# Altium PCB BADGE.PcbDoc
Units mil, origin at the board's own origin, x right, y up, seen from the top; angles counter-clockwise.
Board outline 1181.1 x 1496.06 mil, 2 copper layers (Top Layer, Bottom Layer), stack 65.792 mil thick; 25 components, 22 nets, 110 pads, 16 vias.
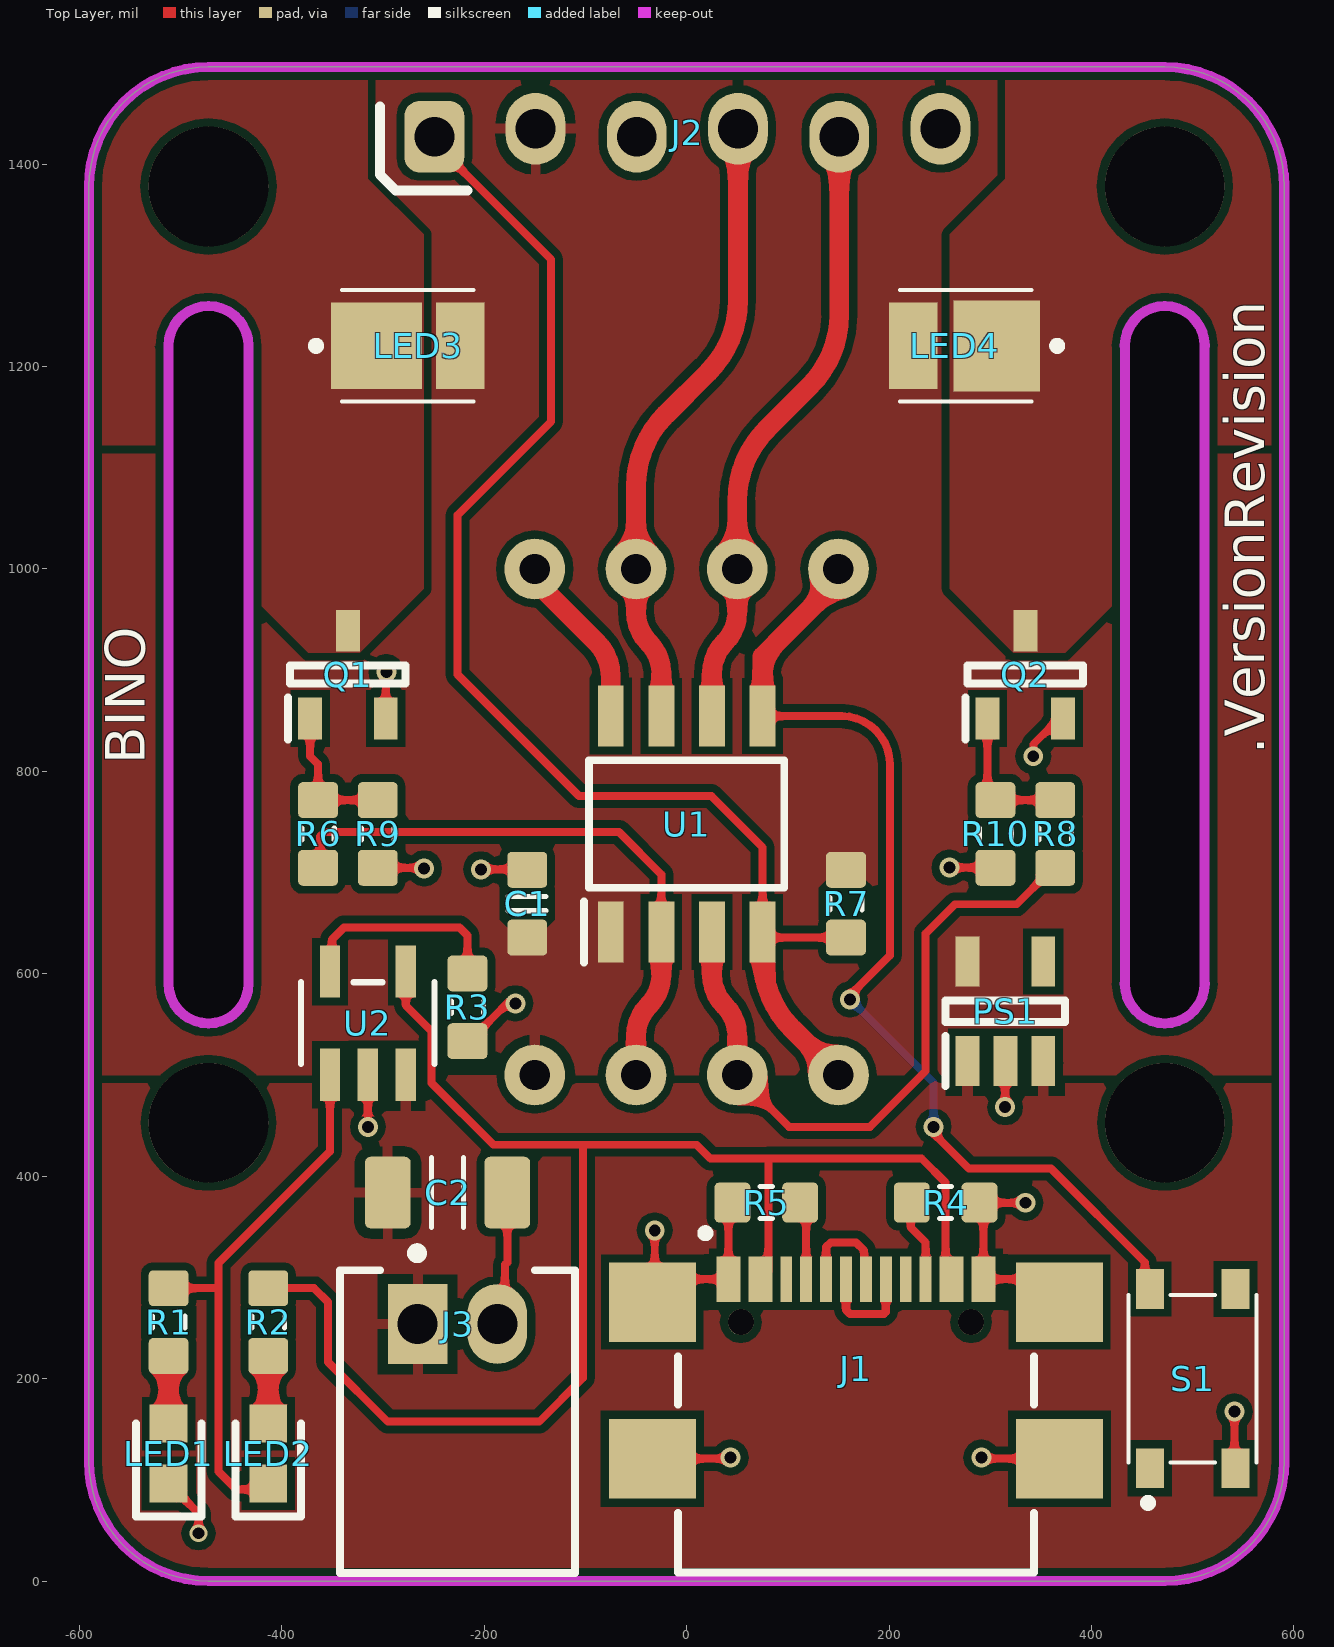
[diagram p0: Top Layer view]
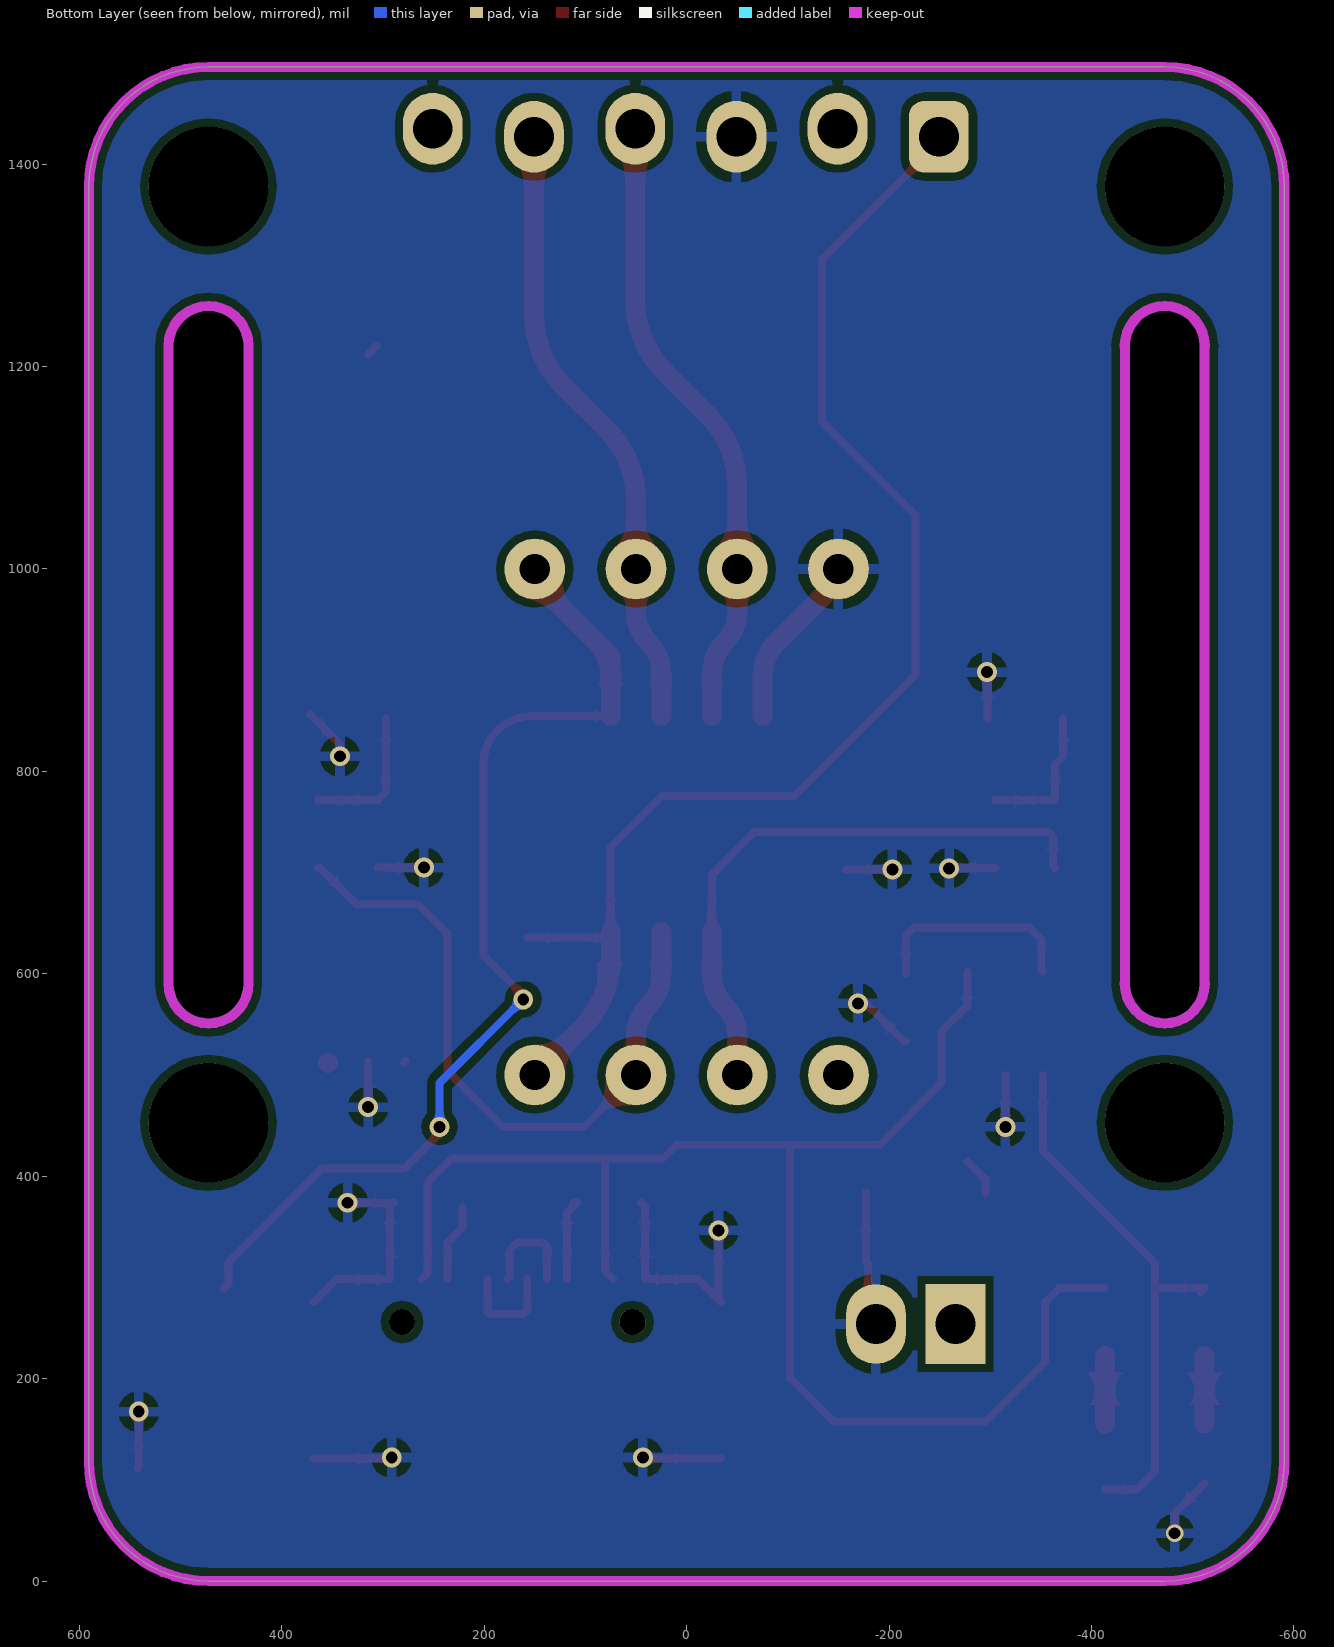
[diagram p1: Bottom Layer view, seen from below]

## Layer stack, top to bottom
Top Solder: solder mask 0.4, Solder Resist, Dk 3.5
Top Layer: signal copper 1.4
Dielectric1: dielectric 62.9921, FR-4, Dk 4.8
Bottom Layer: signal copper 1.4
Bottom Solder: solder mask 0.4, Solder Resist, Dk 3.5

## Board outline
-590.55,118.11 ccw(c-472.44,118.11) -472.44,0 472.44,0 ccw(c472.44,118.11) 590.55,118.11 590.55,1377.95 ccw(c472.44,1377.95) 472.44,1496.06 -472.44,1496.06 ccw(c-472.44,1377.95) -590.55,1377.95
cut-out: 433.07,1220.47 cw(c472.44,1220.47) 472.44,1259.84 cw(c472.44,1220.47) 511.81,1220.47 511.81,590.55 cw(c472.44,590.55) 472.44,551.18 cw(c472.44,590.55) 433.07,590.55
cut-out: -433.07,590.55 cw(c-472.44,590.55) -472.44,551.18 cw(c-472.44,590.55) -511.81,590.55 -511.81,1220.47 cw(c-472.44,1220.47) -472.44,1259.84 cw(c-472.44,1220.47) -433.07,1220.47

## Design rules (kind name [scope] priority, off if disabled: settings)
Clearance Clearance_USB_C [InComponent('J1') vs InComponent('J1')] p1: gap=6 ignorepadtopadclearanceinfootprint=FALSE
Clearance [All] p2: gap=7.87 ignorepadtopadclearanceinfootprint=FALSE
HoleSize [All] p1: absolutevalues=TRUE maxlimit=118.11 minlimit=1 maxpercent=80.000 minpercent=20.000
MinimumSolderMaskSliver MinimumSolderMaskSliver_LED [HasFootprint('STW8A12DMinJ18CAAll') vs HasFootprint('STW8A12DMinJ18CAAll')] p1: minsoldermaskwidth=5
MinimumSolderMaskSliver MinimumSolderMaskSliver_SOT95 [HasFootprint('SOT95P275X110-5N') vs HasFootprint('SOT95P275X110-5N')] p2: minsoldermaskwidth=5
MinimumSolderMaskSliver [All] p3: minsoldermaskwidth=10
PolygonConnect LED_DISSIPATE_3V3 [All vs IsNamedPolygon('TOP_VCC3V3')] p1: thpad.connectstyle=Relief thpad.reliefconductorwidth=10 thpad.reliefentries=4 thpad.polygonreliefangle="90 Angle" thpad.airgapwidth=10 smdpad.connectstyle=Direct smdpad.reliefconductorwidth=10 smdpad.reliefentries=4 smdpad.polygonreliefangle="90 Angle" smdpad.airgapwidth=10 via.connectstyle=Relief via.reliefconductorwidth=10 via.reliefentries=4 via.polygonreliefangle="90 Angle" via.airgapwidth=10
PolygonConnect LED_DISSIPATION [All vs IsNamedPolygon('Top Layer-NetLED3_1') or IsNamedPolygon('Top Layer-NetLED4_1')] p2: thpad.connectstyle=Relief thpad.reliefconductorwidth=10 thpad.reliefentries=4 thpad.polygonreliefangle="90 Angle" thpad.airgapwidth=10 smdpad.connectstyle=Direct smdpad.reliefconductorwidth=10 smdpad.reliefentries=4 smdpad.polygonreliefangle="90 Angle" smdpad.airgapwidth=10 via.connectstyle=Relief via.reliefconductorwidth=10 via.reliefentries=4 via.polygonreliefangle="90 Angle" via.airgapwidth=10
PolygonConnect [All] p3: connectstyle=Relief reliefconductorwidth=10 reliefentries=4 polygonreliefangle="90 Angle" airgapwidth=10
RoutingVias [All] p1: holewidth=28 width=50 viastyle="Through Hole" minholewidth=11.81 minwidth=17.72 maxholewidth=28 maxwidth=19.68
SilkToSolderMaskClearance SilkscreenOverComponentPads [IsPad] p1: minsilkscreentomaskgap=4 clearancetoexposedcopper=TRUE
SolderMaskExpansion [All] p1: expansion=4 istentingtop=FALSE
Width [All] p1: maxlimit=39.37 minlimit=6 preferedwidth=6
27 further rules are at their usual default settings.

## Components (designator, comment, footprint, x,y, rotation, side; value= is the part's Value field where it differs from the comment)
C1 "approved sub OK" CAPC1608X90N -157.48,669.29 r270 top value=100n
C2 "approved sub OK" CAPC3216X180N -236.22,383.86 r0 top value=10µ
J1 "USB4110-GF-A" GCT_USB4110-GF-A 167.32,255.91 r0 top
J2 "pickit3" CONN_ICSP -249.21,1427.17 r0 top
J3 "S2B-PH-K-S(LF)(SN)" JST-S2B-PH-K-S_V -226.38,157.48 r0 top
LED1 "150060GS75000" LEDC1608X80N -511.81,125.98 r90 top
LED2 "150060RS75000" LEDC1608X80N -413.39,125.98 r90 top
LED3 "S1W0-2835408003-0000003S-00005" STW8A12DMINJ18CAALL -275.59,1220.47 r180 top
LED4 "S1W0-2835408003-0000003S-00005" STW8A12DMinJ18CAAll 275.59,1220.47 r0 top
PS1 "NCP114ASN330T1G" SOT95P275X110-5N 314.96,562.99 r90 top
Q1 "2N7002NXBKR" SOT95P230X110-3N -334.65,895.67 r90 top
Q2 "2N7002NXBKR" SOT95P230X110-3N 334.65,895.67 r90 top
R1 "Thick Film" RESC1608X55N -511.81,255.91 r270 top value=1K
R2 "Thick Film" RESC1608X55N -413.39,255.91 r270 top value=1K
R3 "Thick Film" RESC1608X55N -216.54,566.93 r270 top value=10K
R4 "RES 5.1K OHM 5% 1/10W 0603" RESC1608X55N 255.91,374.02 r180 top value=5.1K
R5 "RES 5.1K OHM 5% 1/10W 0603" RESC1608X55N 78.74,374.02 r0 top value=5.1K
R6 "Thick Film" RESC1608X55N -364.17,738.19 r90 top value=1K
R7 "Thick Film" RESC1608X55N 157.48,669.29 r270 top value=10K
R8 "Thick Film" RESC1608X55N 364.17,738.19 r90 top value=1K
R9 "Thick Film" RESC1608X55N -305.12,738.19 r270 top value=1M
R10 "Thick Film" RESC1608X55N 305.12,738.19 r270 top value=1M
S1 "PTS815_SJM_250_SMTR_LFS" PTS815SJM250SMTRLFS 500,200 r90 top
U1 "PIC12F1840-I_SN" SOIC127P600X175-8N 0,748.03 r90 top
U2 "MCP73831T-2ACI/OT" SOT-23-5_MC_MCH -314.96,551.18 r90 top

## Footprints (in the part's own frame and the unit in brackets; to place one, negate y for a bottom-side part, rotate by r counter-clockwise, add the part's x,y. Pads: shape width x height; smd on the part's side, far side on the other; paste and mask are expansions set on the pad)
CAPC1608X90N [mm] "Chip Capacitor, Body 1.6x0.8mm, EIA 0603, IPC Medium Density"
  round 0.254 on Mech15: 0(0,0)
  rrect25% 0.9x1 smd: 1(-0.85,0) 2(0.85,0)
  Top Layer pour cut-out: -0.6,0.5 -0.4,0.7 0.4,0.7 0.6,0.5 0.6,-0.5 0.4,-0.7 -0.4,-0.7 -0.6,-0.5
  silkscreen extent -0.18,-0.48 0.18,0.48, body extent -0.85,-0.45 0.85,0.45, height 0.89
CAPC3216X180N [mm] "Chip Capacitor, Body 3.2x1.6mm, 1.8mm H, EIA 1206, IPC Medium Density"
  round 0.508 on Mech15: 0(0,0)
  rrect25% 1.15x1.8 smd: 1(-1.5,0) 2(1.5,0)
  silkscreen extent -0.4,-0.88 0.4,0.88, body extent -1.7,-0.9 1.7,0.9, height 1.8
CONN_ICSP [mm] "ICSP CONNECTOR FOR PICKIT3  PITCH2.54MM"
  rrect50% 1.5x1.8 hole 1: 1(0,0)
  oval 1.5x1.8 hole 1: 2(2.54,0.2) 3(5.08,0) 4(7.62,0.2) 5(10.16,0) 6(12.7,0.2)
GCT_USB4110-GF-A [mm]
  rect 0.6x1.15 smd: A1/B12(-3.2,1.075) A4/B9(-2.4,1.075) B1/A12(3.2,1.075) B4/A9(2.4,1.075)
  rect 0.3x1.15 smd: A5(-1.25,1.075) A6(-0.25,1.075) A7(0.25,1.075) A8(1.25,1.075) B5(1.75,1.075) B6(0.75,1.075) B7(-0.75,1.075) B8(-1.75,1.075)
  rect 2.18x2 smd: S1(-5.11,0.5) S2(5.11,0.5) S3(-5.11,-3.43) S4(5.11,-3.43)
  round 0.65 hole 0.65 unplated: ""(-2.89,0) ""(2.89,0)
  silkscreen extent -4.47,-6.28 4.47,2.33, body extent -5.65,-6.28 5.65,1.4, height 3.25
JST-S2B-PH-K-S_V [mm] "THD, 2-Leads, Body 7.6x5.9mm, Pitch 2mm"
  rect 1.5x2 hole 1: 1(-1,2.45)
  oval 1.5x2 hole 1: 2(1,2.45)
  silkscreen extent -2.95,-3.8 2.95,4.35, body extent -2.95,-3.8 2.95,3.8, height 4.8
LEDC1608X80N [mm]
  rect 0.95x0.95 smd: 1(-0.75,0) 2(0.75,0)
  silkscreen extent -1.58,-0.82 0.75,0.82, body extent -0.8,-0.4 0.8,0.4, height 0.7
PTS815SJM250SMTRLFS [mm]
  rect 1x0.7 smd: 1(-2.25,1.075) 2(2.25,1.075) 3(-2.25,-1.075) 4(2.25,-1.075)
  silkscreen extent -3.22,-1.6 2.1,1.61, body extent -2.25,-1.6 2.25,1.6, height 2.5
RESC1608X55N [mm] "Chip Resistor, Body 1.6x0.8mm, EIA 0603, IPC Medium Density"
  round 0.254 on Mech15: 0(0,0)
  rrect25% 0.9x1 smd: 1(-0.85,0) 2(0.85,0)
  Top Layer pour cut-out: -0.6,0.5 -0.4,0.7 0.4,0.7 0.6,0.5 0.6,-0.5 0.4,-0.7 -0.4,-0.7 -0.6,-0.5
  silkscreen extent -0.15,-0.41 0.15,0.41, body extent -0.87,-0.47 0.88,0.48, height 0.54
SOIC127P600X175-8N [mm]
  rect 1.525x0.65 smd: 1(-2.712,1.905) 2(-2.712,0.635) 3(-2.712,-0.635) 4(-2.712,-1.905) 5(2.712,-1.905) 6(2.712,-0.635) 7(2.712,0.635) 8(2.712,1.905)
  silkscreen extent -3.47,-2.45 1.6,2.58, body extent -3,-2.45 3,2.45, height 1.75
SOT95P230X110-3N [mm]
  rect 1.05x0.6 smd: 1(-1.1,0.95) 2(-1.1,-0.95) 3(1.1,0)
  silkscreen extent -1.63,-1.45 0.23,1.5, body extent -1.15,-1.45 1.15,1.45, height 1.1
SOT95P275X110-5N [mm]
  rect 1.25x0.6 smd: 1(-1.25,0.95) 2(-1.25,0) 3(-1.25,-0.95) 4(1.25,-0.95) 5(1.25,0.95)
  silkscreen extent -1.88,-1.5 0.28,1.5, body extent -1.38,-1.5 1.38,1.5, height 1.1
SOT-23-5_MC_MCH [mil]
  rect 51.56x20 smd paste+0 mask+0: 1(-51,37.4) 2(-51,0) 3(-51,-37.4) 4(51,-37.4) 5(51,37.4)
  silkscreen extent -41,-66 41,66, body extent -63,-61 63,61, height 57
STW8A12DMINJ18CAALL [mm]
  rect 2.28x2.17 smd: 1(0.785,0)
  rect 1.22x2.17 smd: 2(-1.315,0)
  silkscreen extent -1.65,-1.4 2.4,1.4, body extent -1.5,-1 1.5,1, height 0.52
STW8A12DMinJ18CAAll [mm]
  rect 2.17x2.28 smd: 1(0.785,0)
  rect 1.22x2.17 smd: 2(-1.315,0)
  silkscreen extent -1.65,-1.4 2.4,1.4, body extent -1.5,-1 1.5,1, height 0.52

## Part data
C1: library part CAPC_100n_0603_X7R_50V_10%, "Capacitor SMD Cer 100nF 10% 50V X7R 0603", Manufacturer 1="AVX Corporation", Manufacturer 2="TDK Corporation", Manufacturer Part Number 1=06035C104KAT2A, Manufacturer Part Number 2=C1608X7R1H104K, Package / Case="0603 (1608 Metric)", Ratings="50V; X7R", Supplier Part Number 1=478-5052-1-ND, Tolerance=±10%, ComponentLink1Description=http://www.avx.com/docs/Catalogs/cx7r.pdf, ComponentLink1URL=http://www.avx.com/docs/Catalogs/cx7r.pdf, ComponentLink2Description=http://product.tdk.com/capacitor/mlcc/en/documents/mlcc_commercial_general_en.pdf, ComponentLink2URL=http://product.tdk.com/capacitor/mlcc/en/documents/mlcc_commercial_general_en.pdf, Material=ceramic, SCDType=spec, Supplier 1=Digi-Key, Supplier 2=Digi-Key, Supplier Part Number 2=445-1314-1-ND
C2: library part CAPC_10u_1206_25V, "Capacitor SMD Cer 10uF 10% 25V X7R 1206", Package / Case="1206 (3216 metric)", Ratings="16V; X7R", Supplier Part Number 1=1276-1804-1-ND, Tolerance=±10%, Material=ceramic, SCDType=spec, Supplier 1=Digi-Key
J1: "USB-C _USB TYPE-C_ USB 2.0 Receptacle Connector 24 _16+8 Dummy_ Position Surface Mount, Right Angle; Through Hole", Package=None, Digi-Key_Part_Number=2073-USB4110-GF-A-1-ND, Digi-Key_Purchase_URL=https://www.digikey.com/product-detail/en/gct/USB4110-GF-A/2073-USB4110-GF-A-1-ND/10384548?utm_source=snapeda&utm_medium=aggregator&utm_campaign=symbol, MF=GCT, MP=USB4110-GF-A, SnapEDA_Link=https://www.snapeda.com/parts/USB4110-GF-A/Global%20Connector%20Technology/view-part/4001167/?ref=snap
J2: library part "CONN PROG PICKIT3", "CONN PROG PICKIT3 6VIAS", device=pickit3, pitch_in_mm=2.54
J3: library part "CONN JST 2P 2MM", "Male Header, Pitch 2 mm, 1 x 2 Position, Height 4.8 mm, Tail Length 3.4 mm, -25 to 85 degC, RoHS, Bulk", Capacitance="10 uF", Case\Package=Radial, Max Operating Temperature="85 degC", Min Operating Temperature="-40 degC", Package Quantity=200, Tolerance=20%, Voltage Rating="50 V", ComponentLink1Description=Datasheet, ComponentLink1URL=http://www.jst-mfg.com/product/pdf/eng/ePH.pdf, DatasheetVersion=Dec-12, Diameter="5 mm", Height="11 mm", Lead Pitch="2 mm", Length="11 mm", Mount="Through Hole", PackageDescription="Male Header, Pitch 2 mm, 1 x 2 Position, Height 4.8 mm, Tail Length 3.4 mm", PackageReference=S2B-PH-K-S, Packaging=Bulk, Pins=2, Radiation Hardening=No, REACH SVHC="No SVHC", RoHSCompliant=true, Voltage Rating (DC)="50 V"
LED1: "LED", Manufacturer_Name="Wurth Elektronik", Mouser Part Number=710-150060GS75000, Datasheet Link=https://componentsearchengine.com/Datasheets/2/150060GS75000.pdf, Height=0.8mm, Manufacturer_Part_Number=150060GS75000, Mouser Price/Stock=https://www.mouser.co.uk/ProductDetail/Wurth-Elektronik/150060GS75000?qs=LlUlMxKIyB0UYkq5lDO8nA%3D%3D
LED2: "LED", Manufacturer_Name="Wurth Elektronik", Mouser Part Number=710-150060RS75000, Datasheet Link=http://katalog.we-online.de/led/datasheet/150060RS75000.pdf, Height=0.8mm, Manufacturer_Part_Number=150060RS75000, Mouser Price/Stock=https://www.mouser.co.uk/ProductDetail/Wurth-Elektronik/150060RS75000?qs=LlUlMxKIyB3QnmZ3fw%2FVCA%3D%3D
LED3 LED4: "LED", Manufacturer_Name="SEOUL SEMICONDUCTOR", Datasheet Link=http://seoulsemicon.com/upload2/STW8A12D_S1.pdf, Height=0mm, Manufacturer_Part_Number=S1W0-2835408003-0000003S-00005
PS1: "Power Supply", Manufacturer_Name="ON Semiconductor", Mouser Part Number=863-NCP114ASN330T1G, Arrow Part Number=NCP114ASN330T1G, Arrow Price/Stock=https://www.arrow.com/en/products/ncp114asn330t1g/on-semiconductor, Datasheet Link=https://componentsearchengine.com/Datasheets/2/NCP114ASN330T1G.pdf, Height=1.1mm, Manufacturer_Part_Number=NCP114ASN330T1G, Mouser Price/Stock=https://www.mouser.co.uk/ProductDetail/ON-Semiconductor/NCP114ASN330T1G?qs=OycAS1CGnljPBnaqdh%252BGIA%3D%3D
Q1 Q2: "MOSFET (N-Channel)", Manufacturer_Name=Nexperia, Mouser Part Number=771-2N7002NXBKR, Arrow Part Number=2N7002NXBKR, Arrow Price/Stock=https://www.arrow.com/en/products/2n7002nxbkr/nexperia, Datasheet Link=https://componentsearchengine.com/Datasheets/1/2N7002NXBKR.pdf, Height=1.1mm, Manufacturer_Part_Number=2N7002NXBKR, Mouser Price/Stock=https://www.mouser.co.uk/ProductDetail/Nexperia/2N7002NXBKR?qs=%252B6g0mu59x7J2ddJstTJGkQ%3D%3D
R1 R2 R6 R8: library part RES_1K_0603_5%, "Resistor SMD chip 1k Ohm 0.1W 5% 0603", Manufacturer 1=Yageo, Manufacturer 2="Vishay Dale", Manufacturer Part Number 1=RC0603JR-071KL, Manufacturer Part Number 2=CRCW06031K00JNEA, Package / Case="0603 (1608 metric)", Ratings="1/10 W", Supplier Part Number 1=311-1.0KGRCT-ND, Tolerance=±5%, ComponentLink1Description=http://www.yageo.com/documents/recent/PYu-RC0603_51_RoHS_L_4.pdf, ComponentLink1URL=http://www.yageo.com/documents/recent/PYu-RC0603_51_RoHS_L_4.pdf, ComponentLink2Description=http://www.vishay.com/doc?20008, ComponentLink2URL=http://www.vishay.com/doc?20008, Material="Thick Film", SCDType=spec, Supplier 1=Digi-Key, Supplier 2=Digi-Key, Supplier Part Number 2=541-1.0KGCT-ND
R3 R7: library part RES_10K_0603_5%, "Resistor SMD chip 10k Ohm 0.1W 5% 0603", Manufacturer 1=Yageo, Manufacturer 2="Vishay Dale", Manufacturer Part Number 1=RC0603JR-0710KL, Manufacturer Part Number 2=CRCW060310K0JNEA, Package / Case="0603 (1608 metric)", Ratings="1/10 W", Supplier Part Number 1=311-10KGRCT-ND, Tolerance=±5%, ComponentLink1Description=http://www.yageo.com/documents/recent/PYu-RC0603_51_RoHS_L_4.pdf, ComponentLink1URL=http://www.yageo.com/documents/recent/PYu-RC0603_51_RoHS_L_4.pdf, ComponentLink2Description=http://www.vishay.com/doc?20035, ComponentLink2URL=http://www.vishay.com/doc?20035, Material="Thick Film", SCDType=spec, Supplier 1=Digi-Key, Supplier 2=Digi-Key, Supplier Part Number 2=541-10KGCT-ND
R4 R5: "5.1 kOhms ±5% 0.1W, 1/10W Chip Resistor 0603 (1608 Metric) Automotive AEC-Q200, Moisture Resistant Thick Film", Supplier Part Number 1=2019-RK73B1JTTD512JCT-ND, Supplier 1=Digi-Key
R9 R10: library part RES_1M_0603_5%, "Resistor SMD chip 1M Ohm 0.1W 5% 0603", Manufacturer 1="Vishay Dale", Manufacturer 2=Yageo, Manufacturer Part Number 1=CRCW06031M00JNEA, Manufacturer Part Number 2=RC0603JR-071ML, Package / Case="0603 (1608 metric)", Ratings="1/10 W", Supplier Part Number 1=541-1.0MGCT-ND, Tolerance=±5%, ComponentLink1Description=http://www.vishay.com/doc?20008, ComponentLink1URL=http://www.vishay.com/doc?20008, ComponentLink2Description=http://www.yageo.com/documents/recent/PYu-RC0603_51_RoHS_L_4.pdf, ComponentLink2URL=http://www.yageo.com/documents/recent/PYu-RC0603_51_RoHS_L_4.pdf, Material="Thick Film", SCDType=spec, Supplier 1=Digi-Key, Supplier 2=Digi-Key, Supplier Part Number 2=311-1.0MGRCT-ND
S1: "Switch", Arrow Part Number="PTS815 SJM 250 SMTR LFS", Manufacturer_Name="C & K COMPONENTS", Mouser Part Number=611-PTS815SJM250SMTR, Arrow Price/Stock=https://www.arrow.com/en/products/pts815-sjm-250-smtr-lfs/ck, Datasheet Link="https://componentsearchengine.com/Datasheets/1/PTS815 SJM 250 SMTR LFS.pdf", Height=2.7mm, Manufacturer_Part_Number="PTS815 SJM 250 SMTR LFS", Mouser Price/Stock=https://www.mouser.co.uk/ProductDetail/CK/PTS815-SJM-250-SMTR-LFS?qs=ahcBuItHZ3xKWmfV%2F2E6bA%3D%3D
U1: "Integrated Circuit", Arrow Part Number=PIC12F1840-I/SN, Manufacturer_Name=Microchip, Mouser Part Number=579-PIC12F1840-I/SN, Arrow Price/Stock=https://www.arrow.com/en/products/pic12f1840-isn/microchip-technology, Datasheet Link=http://ww1.microchip.com/downloads/en/DeviceDoc/40001441F.pdf, Height=1.75mm, Manufacturer_Part_Number=PIC12F1840-I/SN, Mouser Price/Stock=https://www.mouser.co.uk/ProductDetail/Microchip-Technology/PIC12F1840-I-SN?qs=gdymDg%2FOn%252BGgQL%2FWyG8YaA%3D%3D
U2: library part MCP73831T-2ACI/O, "No Description Available", Built_By=EMA_UL_Team, Copyright="Copyright (C) 2018 Accelerated Designs. All rights reserved", Manufacturer_Part_Number=MCP73831T-2ACI/OT, RefDes=RefDes, SourceLibrary=Microchip_2011-05-13, Type=DEV, Vendor=Microchip

## Free pads (board coordinates)
  round 60 hole 30: 1(-150,500) 2(-50,500) 3(50,500) 4(150,500) 5(150,1000) 6(50,1000) 7(-50,1000) 8(-150,1000)
  round 118.11 hole 118.11: 10(-472.44,452.76) 10(-472.44,1377.95) 10(472.44,452.76) 10(472.44,1377.95)

## Via types
v1: diameter 19.68, hole 11.81, Top Layer to Bottom Layer, tented both sides, 11 vias
v2: diameter 19.68, hole 11.81, Top Layer to Bottom Layer, 4 vias
v3: diameter 17.72, hole 11.81, Top Layer to Bottom Layer, tented both sides, 1 vias

## Nets (pads, with @x,y where several pads share a name; then routed paths per layer and width w, separated by ;. In a path a pad name is that pad's centre, name@x,y a point inside that pad or via, vN(x,y) a via of type N, cw(c..) or ccw(c..) an arc to the next point about the centre after c; other vN are vias at no path point)
CC1: J1.A5 R5.2 | length 83.8
  Top Layer w7.87: R5.2 108.27,374.02 118.11,364.17 J1.A5
CC2: J1.B5 R4.2 | length 77
  Top Layer w7.87: R4.2@221.46,369.09 221.46,349.41 236.22,334.65 J1.B5
DN: J1.A7 J1.B7 | length 103.7
  Top Layer w7.87: J1.B7 137.8,330.03 142.41,334.65 167.32,334.65 175.2,326.77 175.2,300.2 J1.A7
DP: J1.A6 J1.B6 | length 104.8
  Top Layer w7.87: J1.A6 157.48,267.72 161.42,263.78 194.88,263.78 196.85,265.75 J1.B6
GND: C1.1 C2.2 J1.A1/B12 J1.B1/A12 J1.S1 J1.S2 J1.S3 J1.S4 J2.3 J3.2 LED1.1 pad.8 PS1.2 Q1.2 Q2.2 R3.2 R4.1 R5.1 R9.2 R10.2 S1.3 U1.8 U2.2 | length 1398.1
  Top Layer w7.87: LED1.1 -482.28,66.93 v3(-482.28,47.24) ; v2@-314.96,452.76 U2.2 ; R9.2 v1@-259.84,704.72 ; Q1.2 v1@-297.24,897.64 ; R3.2 -214.57,533.46 -177.17,570.87 v2(-169.29,570.87) ; v1(-203.25,703.25) -157.97,703.25 C1.1 ; J3.2 -179.47,261.47 -179.47,312.65 -177.17,314.96 C2.2 ; U1.8@-75.77,855.57 U1.8 ; J1.S3 38.19,120.87 39.37,122.05 v2(43.31,122.05) ; J1.S1 J1.S1@-31.5,277.95 ; v1(-31.5,346.46) J1.S1@-31.5,277.95 ; R5.1 41.34,370.08 J1.A1/B12 -11.22,298.23 J1.S1@-31.5,277.95 ; v1(259.6,704.97) R10.2@304.87,704.97 ; R4.1 R4.1@289.62,373.77 ; v2(291.34,122.05) 292.52,120.87 J1.S4 ; v1(314.71,468.26) PS1.2@314.71,513.53 ; v1(334.89,373.77) R4.1@289.62,373.77 ; v1(342.52,814.96) 342.52,826.77 Q2.2@371.8,856.05 ; J1.S2 345.87,298.23 J1.B1/A12 293.31,370.08 R4.1@289.62,373.77 ; v1(541.34,167.32) 541.34,112.4 S1.3
  Top Layer w19.68: pad.8@-149.23,987.82 -89.03,927.62 cw(c-123,893.7) -75,893.7 U1.8
  other v1: -259.35,704.23 -296.75,898.13
  other v2: -314.96,448.82
ICSPCLK: J2.5 pad.6 U1.6 | length 598.3
  Top Layer w19.68: U1.6 25,897.09 cw(c67.68,897.09) 37.5,927.26 ccw(c7.32,957.44) 50,957.44 pad.6@50,975.2 ; pad.6@42.29,992.29 pad.6 50,1067.63 cw(c150,1067.63) 51.97,1087.41 cw(c150,1067.63) 79.29,1138.34 121.5,1180.55 ccw(c50.79,1251.26) 150.79,1251.26 J2.5
ICSPDAT: J2.4 pad.7 U1.7 | length 644.9
  Top Layer w7.87: pad.7@-50,975.2 pad.7 pad.7@-50,975.2
  Top Layer w19.68: pad.7@-50,975.2 -50,957.44 ccw(c-7.32,957.44) -37.5,927.26 cw(c-67.68,897.09) -25,897.09 U1.7 ; pad.7 -50,1081.81 cw(c50,1081.81) -20.71,1152.52 21.5,1194.73 ccw(c-49.21,1265.44) 50.79,1265.44 J2.4
M\C\L\R\: J2.1 pad.4 R7.2 U1.4 | length 1329.3
  Top Layer w7.87: J2.1 -249.21,1421.26 -133.86,1305.91 -133.86,1145.67 -226.38,1053.15 -226.38,895.67 -106.3,775.59 24.41,775.59 75,725 U1.4 ; U1.4@75.77,638.01 77.95,635.83 R7.2 ; pad.4 pad.4@153.74,503.74
  Top Layer w19.68: U1.4 75,616.42 ccw(c175,616.42) 104.29,545.71 pad.4
NetLED1_2: LED1.2 R1.2 | length 131.9
  Top Layer w7.87: LED1.2@-511.81,157.48 R1.2
  Top Layer w19.68: LED1.2 R1.2
NetLED2_2: LED2.2 R2.2 | length 66.9
  Top Layer w19.68: LED2.2 R2.2
NetLED3_1: LED3.1 Q1.3
NetLED4_1: LED4.1 Q2.3 | length 12
  Top Layer w7.87: LED4.1 LED4.1@314.96,1212.01
NetQ1_1: Q1.1 R6.2 R9.1 | length 143
  Top Layer w7.87: Q1.1 -372.05,814.96 -364.17,807.09 R6.2 R9.1
NetQ2_1: Q2.1 R8.2 R10.1 | length 143
  Top Layer w7.87: Q2.1 297.24,779.53 R10.1 R8.2
NetR3_1: R3.1 U2.5 | length 211.9
  Top Layer w7.87: U2.5 -350.39,604.15 -350.39,633.86 -338.58,645.67 -224.41,645.67 -216.54,637.8 R3.1
PWM1: pad.2 R6.1 U1.2 | length 595.8
  Top Layer w7.87: U1.2 -25,698.23 -66.93,740.16 -357.59,740.16 -362.2,735.55 R6.1@-362.2,706.69 ; R6.1@-362.2,706.69 R6.1 R6.1@-362.2,706.69
  Top Layer w19.68: pad.2 -50,538.62 cw(c-7.32,538.62) -37.5,568.8 ccw(c-67.68,598.98) -25,598.98 U1.2
PWM2: pad.3 R8.1 U1.3 | length 668.9
  Top Layer w7.87: pad.3 101.18,448.82 181.1,448.82 236.22,503.94 236.22,639.76 265.18,668.72 326.2,668.72 362.2,704.72 R8.1
  Top Layer w19.68: U1.3 25,598.98 ccw(c67.68,598.98) 37.5,568.8 cw(c7.32,538.62) 50,538.62 pad.3
RA2: pad.5 S1.2 U1.5 | length 1185.1
  Top Layer w7.87: v1(161.42,574.8) 161.42,578.74 200.79,618.11 200.79,807.09 ccw(c153.27,807.09) 153.27,854.61 U1.5@74.8,854.61 ; v1(244.09,448.82) 244.09,442.25 278.8,407.54 360.17,407.54 452.76,314.96 452.76,293.5 S1.2 ; U1.5@74.8,854.61 U1.5 U1.5@74.8,854.61 ; pad.5@149.61,1000 pad.5 pad.5@149.61,1000
  Top Layer w19.68: 89.03,927.62 ccw(c123,893.7) 75,893.7 U1.5 75,913.58 149.23,987.82 89.06,927.64
  Bottom Layer w7.87: v1(161.42,574.8) 244.09,492.13 v1(244.09,448.82)
STAT: LED2.1 R1.1 U2.1 | length 555.3
  Top Layer w7.87: LED2.1@-413.39,90.55 -444.88,90.55 -462.6,108.27 -462.6,291.34 ; U2.1 -352.36,424.58 -462.6,314.34 -462.6,291.34 ; R1.1 -507.87,285.43 R1.1 ; R1.1 -464.57,289.37 -462.6,291.34
VBAT: C2.1 J3.1 PS1.1 PS1.3 U2.3 | length 48.8
  Top Layer w7.87: C2.1 -295.28,396.65 C2.1@-277.56,414.37 ; J3.1@-267.72,255.91 J3.1 ; PS1.1 PS1.1@279.37,511.97 ; PS1.3 PS1.3@354.17,511.97
  Top Layer w19.68: J3.1@-267.72,251.97 J3.1 ; PS1.3@354.17,511.97 PS1.3@354.33,511.81
VCC3V3: C1.2 J2.2 LED3.2 LED4.2 pad.1 PS1.5 R7.1 U1.1 | length 13.4
  Top Layer w19.68: pad.1 pad.1@-150,507.48 ; J2.2@-149.21,1429.13 J2.2
VCC5V0: J1.A4/B9 J1.B4/A9 R2.1 U2.4 | length 1538.9
  Top Layer w7.87: R2.1 -409.45,289.37 -368.11,289.37 -354.33,275.59 -354.33,216.54 -295.28,157.48 -145.67,157.48 -102.36,200.79 -102.36,431.1 ; U2.4 -277.42,602.04 -277.42,568.76 -251.97,543.31 -251.97,492.13 -190.94,431.1 -102.36,431.1 ; J1.A4/B9 80.71,306.1 80.71,415.35 78.74,417.32 ; J1.B4/A9 255.91,304.13 255.91,393.7 232.28,417.32 78.74,417.32 ; -102.36,431.1 9.84,431.1 23.62,417.32 78.74,417.32
pads on no net: C1.0 C2.0 J1. J1.A8 J1.B8 J2.6 PS1.4 R1.0 R2.0 R3.0 R4.0 R5.0 R6.0 R7.0 R8.0 R9.0 R10.0 S1.1 S1.4

## Polygon pours and split planes (outlines as drawn)
VBAT on Top Layer "Top Layer-VBAT" (solid, pour order 10): -590.55,500 590.55,500 590.55,0 -590.55,0
VCC3V3 on Top Layer "TOP_VCC3V3" (solid, pour order 8): -590.55,1496.06 590.55,1496.06 590.55,500 -590.55,500
NetLED4_1 on Top Layer "Top Layer-NetLED3_1" (solid, remove dead copper, pour order 6): 322.83,917.32 259.84,980.31 259.84,1330.71 314.96,1385.83 314.96,1496.06 590.55,1496.06 590.55,1122.05 433.07,1122.05 433.07,976.38 374.02,917.32
NetLED3_1 on Top Layer "Top Layer-NetLED3_1" (solid, remove dead copper, pour order 4): -322.83,917.32 -259.84,980.31 -259.84,1330.71 -314.96,1385.83 -314.96,1496.06 -590.55,1496.06 -590.55,1122.05 -433.07,1122.05 -433.07,976.38 -374.02,917.32
GND on Bottom Layer "Bottom Layer-No Net" (solid, pour order 0): -590.55,1496.06 -590.55,0 590.55,0 590.55,1496.06

## Keep-outs
Keep-Out Layer:
  lines w10: -511.98,590.38 ccw(c-472.44,590.55) -432.9,590.38 ; -511.81,590.55 -511.81,1220.3 ccw(c-511.98,1220.3) -511.98,1220.47 cw(c-472.44,1220.3) -432.9,1220.47 ; -433.07,590.55 -433.07,1220.3 ; 432.9,590.38 ccw(c472.44,590.55) 511.98,590.38 ; 432.9,1220.47 cw(c472.44,1220.3) 511.98,1220.47 ; 433.07,590.55 433.07,1220.3 ; 511.81,590.55 511.81,1220.3 ; -590.55,118.11 ccw(c-472.44,118.11) -472.44,0 472.44,0 ccw(c472.44,118.11) 590.55,118.11 590.55,1377.95 ccw(c472.44,1377.95) 472.44,1496.06 -472.44,1496.06 ccw(c-472.44,1377.95) -590.55,1377.95 -590.55,118.11

## Silkscreen, mask and mechanical layers (free items; w line width, h text height)
Top Overlay:
  lines w10: -303.15,1456.69 -303.15,1389.76 -287.4,1374.02 -216.54,1374.02
  text ".VersionRevision" at 570.87,816.97 h39.37 r90
  text "BINO" at -535.43,807.13 h39.37 r90

## Dimensions
-590.55,1377.95 to 590.55,1377.95 on Mechanical 15
-472.44,0 to -472.44,1496.06 on Mechanical 15

## Text inside footprints (layer, text, board x,y; h text height)
U2: Mechanical 7 "Default Padstyle: r131_51" at -53.96,238.68 h50 r90; Mechanical 7 "Pin 1 Padstyle: r131_51" at 6.04,263.68 h50 r90; Mechanical 7 "Alt 1 Padstyle: b152_229h76" at 186.04,213.68 h50 r90; Mechanical 7 "Alt 2 Padstyle: b229_152h76" at 246.04,213.68 h50 r90; Mechanical 7 "0.071in/1.803mm" at -470.96,457.43 h25 r90; Mechanical 7 "0.126in/3.2mm" at -545.96,469.93 h25 r90; Mechanical 7 "0.122in/3.099mm" at -302.46,706.68 h25 r90; Mechanical 7 "0.037in/0.95mm" at -321.16,205.18 h25 r90; Mechanical 7 "0.024in/0.61mm" at -133.96,412.68 h25 r90; Mechanical 13 "*" at -329.36,513.18 h50 r90